# EAGLE board sensor_vol_div_eagle4 (EAGLE 7.5.0)
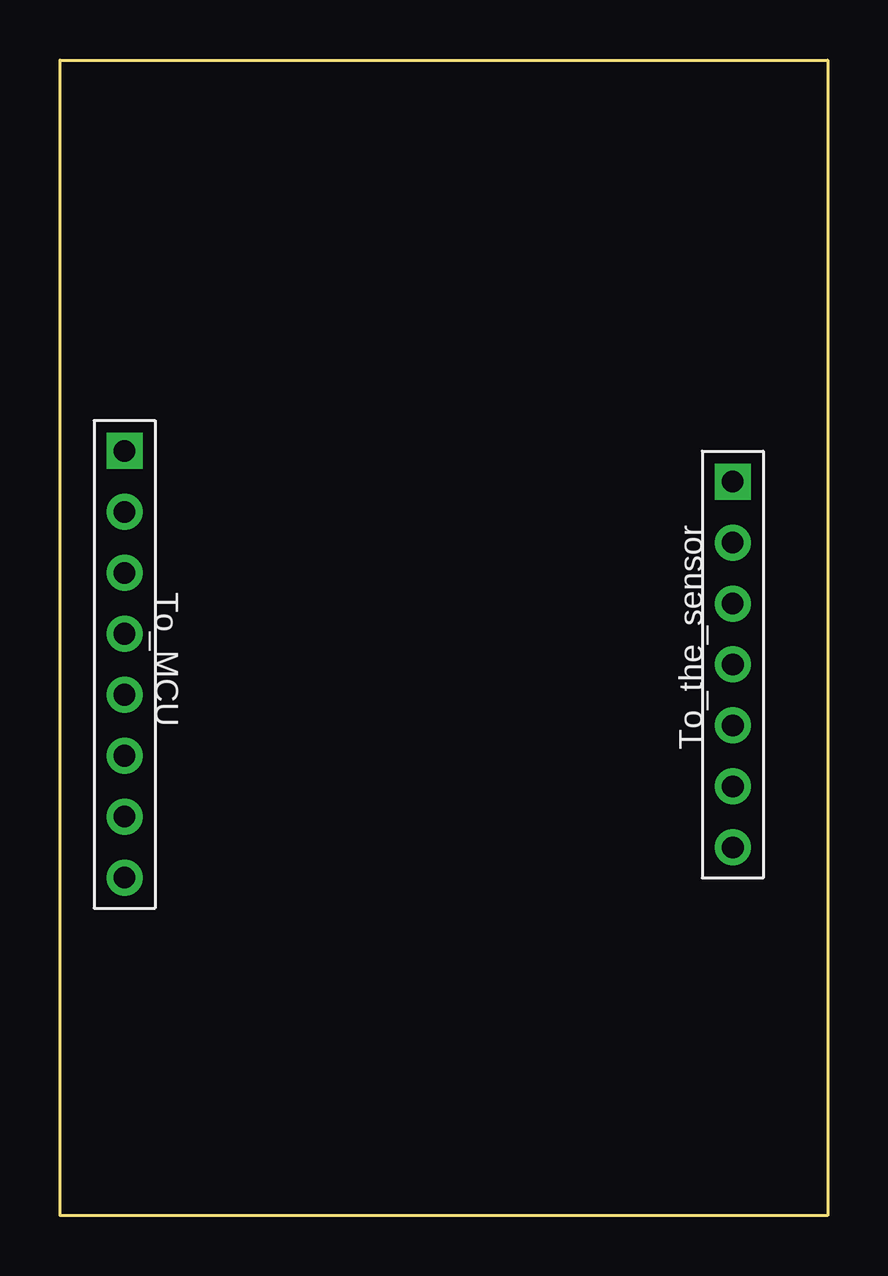
[diagram p0: board, top side]
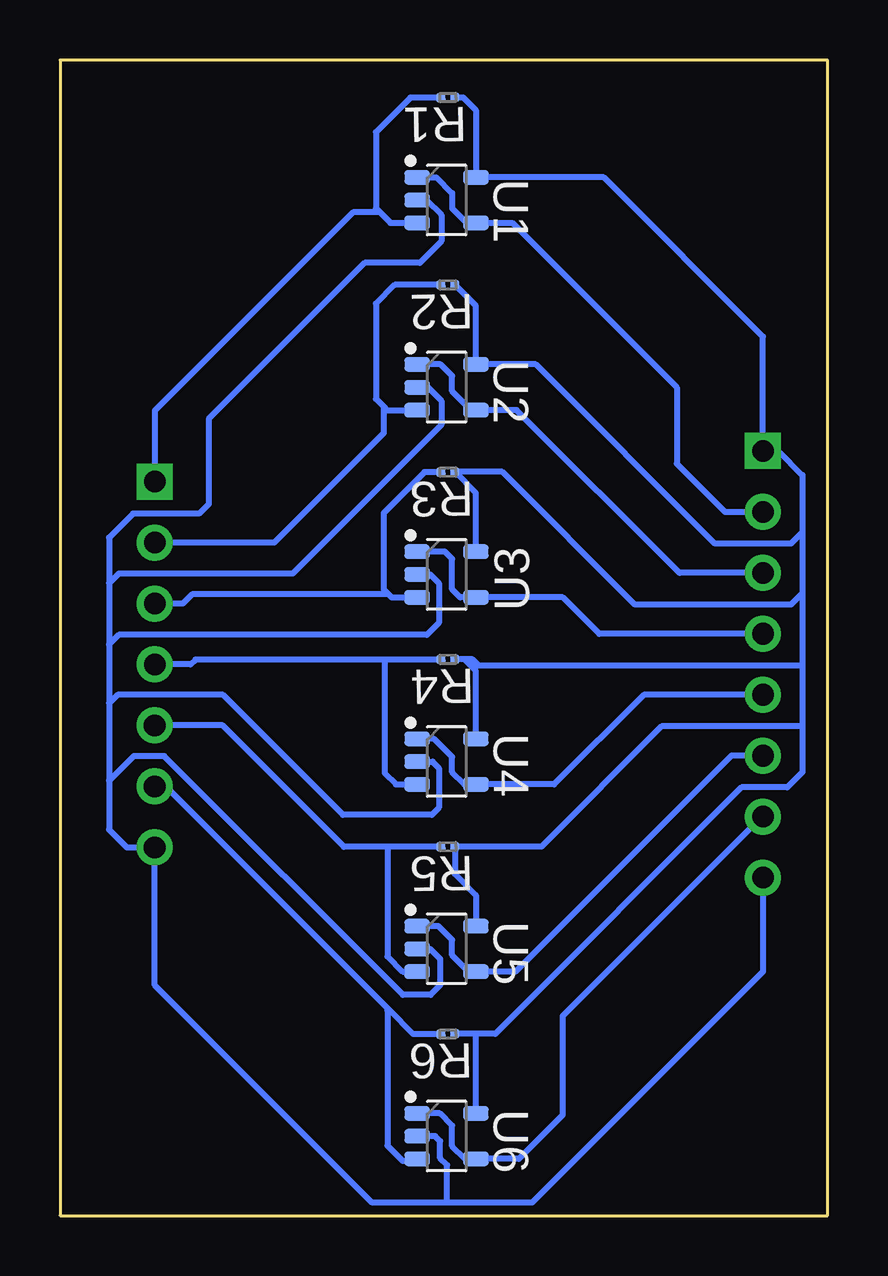
[diagram p1: board, bottom side, seen from below]

Size 32 x 48.15 mm. Coordinates in mm from the lower left corner, seen from the top.
Outline: 0,48.15 32,48.15 32,0 0,0 0,48.15
Copper layers (1*16): Top 0.035mm / dielectric 1.5mm / Bottom 0.035mm
Design rules "default *": minimum track width 10mil, minimum drill 0.61mm, track to track 8mil, track to pad 8mil, pad to pad 8mil, via to via 8mil, smd to smd 8mil, copper to edge 40mil, drill to drill 8mil, minimum pad ring 0mil, minimum via ring 8mil, stop-mask expansion 2mil, vias tented up to drill 19mil, thermal gap 10mil
Net classes: 0 Default: width 0.33 mm, clearance 0.33 mm

## Footprints (pad centres in the part's own frame; a part is rotated, then mirrored left to right if it is on the bottom)
RES_0603_M = smd 0.37 x 0.38: 1 -0.29,0; 2 0.29,0
HDR-1x8 = drill 0.9 pad 1.5 square: 1 -8.89,0 | drill 0.9 pad 1.5: 2 -6.35,0; 3 -3.81,0; 4 -1.27,0; 5 1.27,0; 6 3.81,0; 7 6.35,0; 8 8.89,0
HDR-1x7 = drill 0.9 pad 1.5 square: 1 -7.62,0 | drill 0.9 pad 1.5: 2 -5.08,0; 3 -2.54,0; 4 0,0; 5 2.54,0; 6 5.08,0; 7 7.62,0
SOT23-5P95_280X100L45X40N = smd 0.61 x 1.07: 1 -0.95,-1.225; 2 0,-1.225; 3 0.95,-1.225; 4 0.95,1.225; 5 -0.95,1.225

## Placement (x,y rotation side)
R1  1.78MOhm  [RES_0603_M]  15.83,46.59 181 bottom
R2  1.78MOhm  [RES_0603_M]  15.83,38.78 181 bottom
R3  1.78MOhm  [RES_0603_M]  15.83,30.98 181 bottom
R4  1.78MOhm  [RES_0603_M]  15.83,23.18 181 bottom
R5  1.78MOhm  [RES_0603_M]  15.83,15.37 181 bottom
R6  1.78MOhm  [RES_0603_M]  15.83,7.57 181 bottom
To_MCU  HDR-1X8  [HDR-1x8]  2.69,22.97 270 top
To_the_sensor  HDR-1X7  [HDR-1x7]  28.05,22.96 270 top
U1  AD8615AUJZ-REEL  [SOT23-5P95_280X100L45X40N]  15.88,42.31 270 bottom
U2  AD8615AUJZ-REEL  [SOT23-5P95_280X100L45X40N]  15.88,34.51 270 bottom
U3  AD8615AUJZ-REEL  [SOT23-5P95_280X100L45X40N]  15.88,26.71 270 bottom
U4  AD8615AUJZ-REEL  [SOT23-5P95_280X100L45X40N]  15.88,18.91 270 bottom
U5  AD8615AUJZ-REEL  [SOT23-5P95_280X100L45X40N]  15.88,11.11 270 bottom
U6  AD8615AUJZ-REEL  [SOT23-5P95_280X100L45X40N]  15.88,3.31 270 bottom

## Library data of the parts
R1-R6 = common; UNIQUE_NAME: RES_0603_METRIC
To_MCU = common; UNIQUE_NAME: HDR-1x8
To_the_sensor = common; UNIQUE_NAME: HDR-1x7
U1-U6 = common; DATASHEET: http://datasheets.diptrace.com/analog_devices/AD8615_8616_8618.pdf; MANUFACTURER: Analog Devices; PART_NUMBER_(DIGI-KEY): AD8615AUJZ-REELDKR-ND; UNIQUE_NAME: ANALOG_UJ-5

## Nets
Net_2: R1.1 R2.1 R3.1 R4.1 R5.1 R6.1 To_MCU.1 U1.5 U2.5 U3.5 U4.5 U5.5 U6.5
Net_3: To_MCU.8 To_the_sensor.7 U1.2 U2.2 U3.2 U4.2 U5.2 U6.2
OUT_Op_Amp1: To_MCU.2 U1.1 U1.4
OUT_Op_Amp2: To_MCU.3 U2.1 U2.4
OUT_Op_Amp3: To_MCU.4 U3.1 U3.4
OUT_Op_Amp4: To_MCU.5 U4.1 U4.4
OUT_Op_Amp5: To_MCU.6 U5.1 U5.4
OUT_Op_Amp6: To_MCU.7 U6.1 U6.4
SENSE_IN1: R1.2 To_the_sensor.1 U1.3
SENSE_IN2: R2.2 To_the_sensor.2 U2.3
SENSE_IN3: R3.2 To_the_sensor.3 U3.3
SENSE_IN4: R4.2 To_the_sensor.4 U4.3
SENSE_IN5: R5.2 To_the_sensor.5 U5.3
SENSE_IN6: R6.2 To_the_sensor.6 U6.3

## Tracks (layer width: path | path; a pad name or v marks a point on that pad's centre or on a via)
Net_2
  Bottom 0.25: R1.1 15.19,46.59 14.66,46.06 U1.5 9.32,43.26 2.69,36.63 To_MCU.1 2.05,31.86 1.05,30.86 1.05,28.48 | 1.05,28.48 1.52,28 4.7,28 12.16,35.46 U2.5 14.66,37.91 R2.1 | 1.05,28.48 1.05,25.94 | 1.05,25.94 1.52,25.46 8.03,25.46 13.55,30.98 R3.1 14.66,30.1 U3.5 | 1.05,25.94 1.05,22.92 | 1.05,22.92 14.54,22.92 14.8,23.18 15.14,23.18 | 15.14,23.18 R4.1 | U4.5 14.66,22.7 15.14,23.18 | 1.05,22.92 1.05,20.38 | 1.05,20.38 6.92,20.38 11.92,15.38 R5.1 15.54,14.23 14.66,13.36 U5.5 | 1.05,20.38 1.05,18.48 1.69,17.84 3.59,17.84 13.85,7.57 14.66,7.57 | 14.66,7.57 R6.1 | U6.5 14.66,7.57
Net_3
  Bottom 0.25: To_MCU.8 2.69,10.16 12.32,0.54 15.86,0.54 | 15.86,0.54 18.98,0.54 28.05,9.6 To_the_sensor.7 29.21,15.34 29.95,16.08 29.95,18.12 | 15.86,0.54 15.86,2.11 16.15,2.4 16.15,3.1 16.36,3.31 U6.2 | U5.2 16.56,11.11 16.15,10.7 16.15,9.6 16.55,9.2 17.7,9.2 27.65,19.15 28.92,19.15 29.95,18.12 | U4.2 16.46,18.91 16.2,18.65 16.2,17 16.5,16.7 20.2,16.7 25.2,21.7 29.6,21.7 29.95,21.35 | 29.95,21.35 29.95,18.12 | U3.2 16.56,26.71 16.2,26.35 16.2,24.7 16.7,24.2 29.55,24.2 29.95,23.8 | 29.95,23.8 29.95,21.35 | U2.2 16.66,34.51 16.1,33.95 16.1,32.95 22.3,26.75 29.55,26.75 29.95,26.35 | 29.95,26.35 29.95,23.8 | U1.2 16.71,42.31 16.1,41.7 16.1,40.6 17,39.7 19.3,39.7 25.8,33.2 25.8,29.65 26.2,29.25 28.95,29.25 29.95,28.25 29.95,26.35
OUT_Op_Amp1
  Bottom 0.25: U1.1 16.31,43.26 15.65,42.61 15.65,41.97 15.02,41.34 14.69,41.34 U1.4 13.14,41.36 6.28,34.51 6.28,31.33 4.27,29.32 To_MCU.2
OUT_Op_Amp2
  Bottom 0.25: U2.1 16.13,35.46 15.65,34.98 15.65,34.35 14.86,33.56 U2.4 12.96,33.56 6.18,26.78 To_MCU.3
OUT_Op_Amp3
  Bottom 0.25: U3.1 15.95,27.66 15.65,27.36 15.65,26.09 15.32,25.76 U3.4 11.03,25.76 9.51,24.24 To_MCU.4
OUT_Op_Amp4
  Bottom 0.25: U4.1 16.4,19.86 15.65,19.11 15.65,18.48 15.14,17.96 U4.4 11.4,17.96 7.66,21.7 To_MCU.5
OUT_Op_Amp5
  Bottom 0.25: U5.1 16.22,12.06 15.65,11.49 15.65,10.86 14.96,10.16 U5.4 13.01,10.16 4.01,19.16 To_MCU.6
OUT_Op_Amp6
  Bottom 0.25: U6.1 16.16,4.26 15.65,3.75 15.65,2.9 15.11,2.36 U6.4 12.87,2.36 11.05,4.19 11.05,8.32 2.74,16.62 To_MCU.7
SENSE_IN1
  Bottom 0.25: R1.2 17.39,46.58 18.82,45.14 18.82,41.97 18.65,41.8 | 18.65,41.8 18.22,41.36 U1.3 | 18.65,41.8 19.79,41.8 28.05,33.54 To_the_sensor.1
SENSE_IN2
  Bottom 0.25: R2.2 18.05,38.78 18.82,38 18.82,34.03 18.51,33.72 | 18.51,33.72 18.36,33.56 U2.3 | 18.51,33.72 18.51,32.6 23.07,28.04 To_the_sensor.2
SENSE_IN3
  Bottom 0.25: R3.2 16.8,30.97 18.51,29.27 18.51,26.09 18.3,25.88 | 18.3,25.88 18.18,25.76 U3.3 | 18.3,25.88 26.5,25.88 26.88,25.5 To_the_sensor.3
SENSE_IN4
  Bottom 0.25: R4.2 18.47,23.17 | 18.47,23.17 26.35,23.17 26.56,22.96 To_the_sensor.4 | 18.47,23.17 18.47,18.43 18,17.96 U4.3
SENSE_IN5
  Bottom 0.25: R5.2 18.35,15.37 | 18.35,15.37 20.16,15.37 25.22,20.42 To_the_sensor.5 | 18.35,15.37 18.35,10.8 17.71,10.16 U5.3
SENSE_IN6
  Bottom 0.25: R6.2 17.28,7.56 18.27,8.55 | 18.27,8.55 27.6,17.88 To_the_sensor.6 | 18.27,8.55 18.35,8.55 18.35,2.92 17.71,2.28 17.19,2.28 U6.3

## Text on the board
tPlace: To_the_sensor | To_MCU
bPlace: R1 | U1 | R2 | U2 | R3 | U3 | R4 | U4 | R5 | U5 | R6 | U6